# EAGLE board Compiled_Antenna_Test (EAGLE 7.7.0)
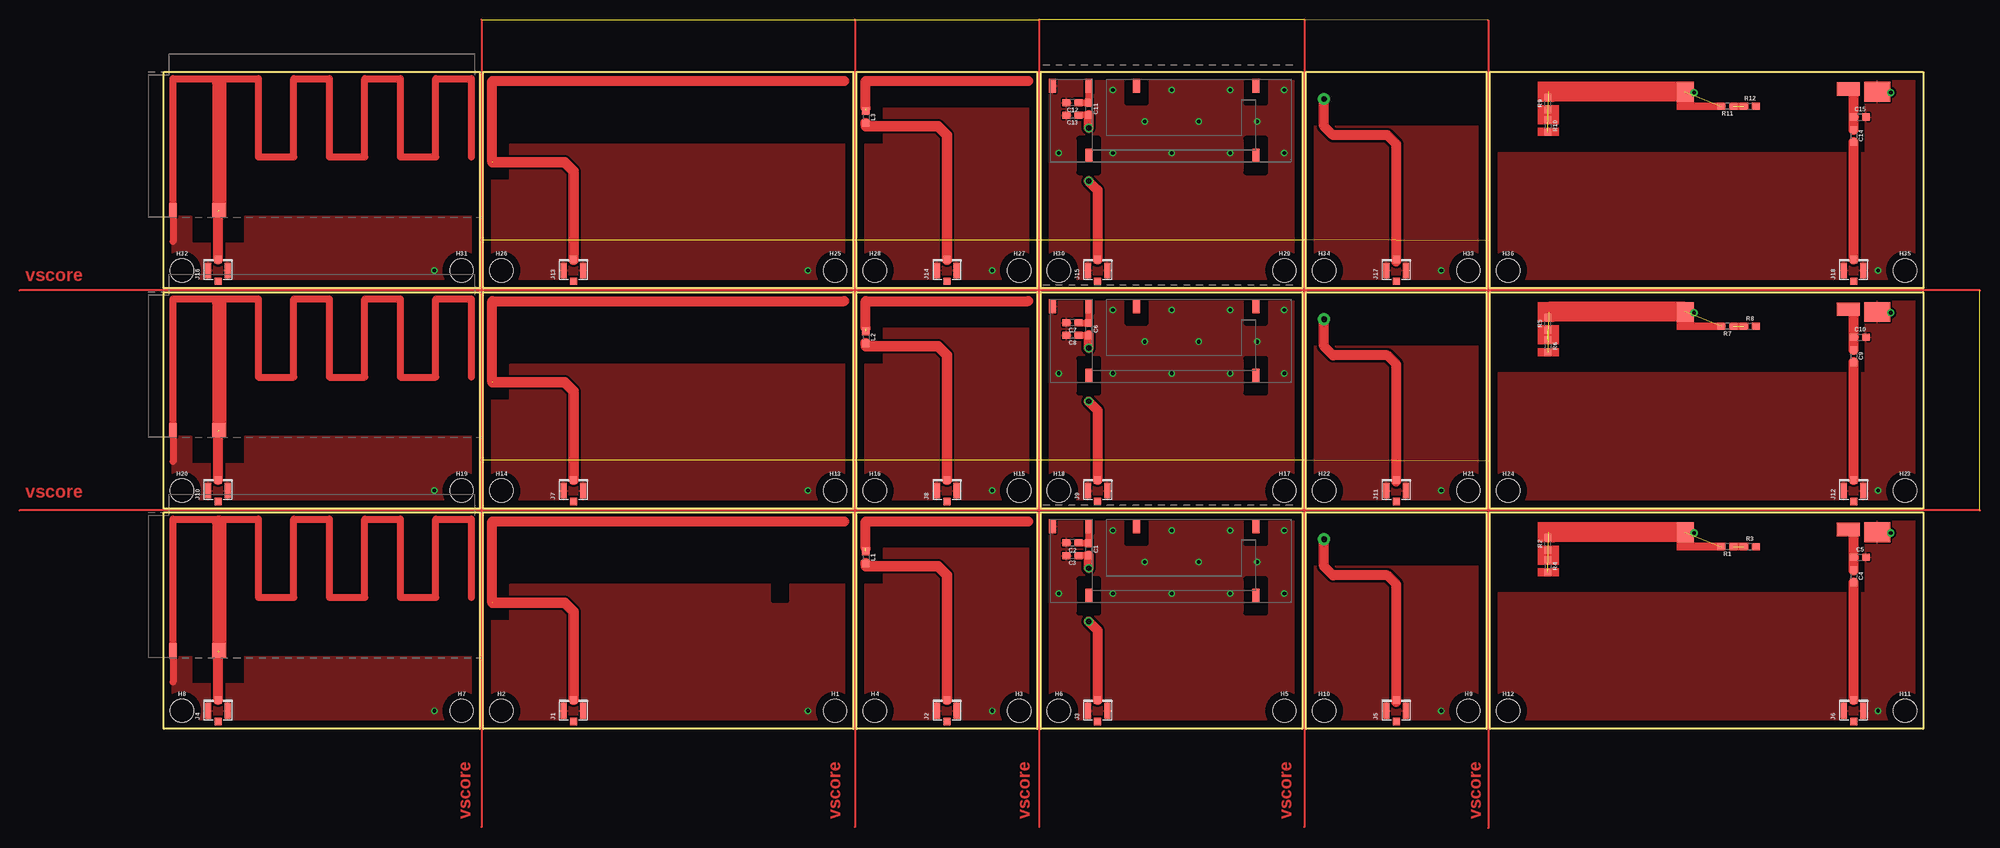
[diagram p0: board, top side]
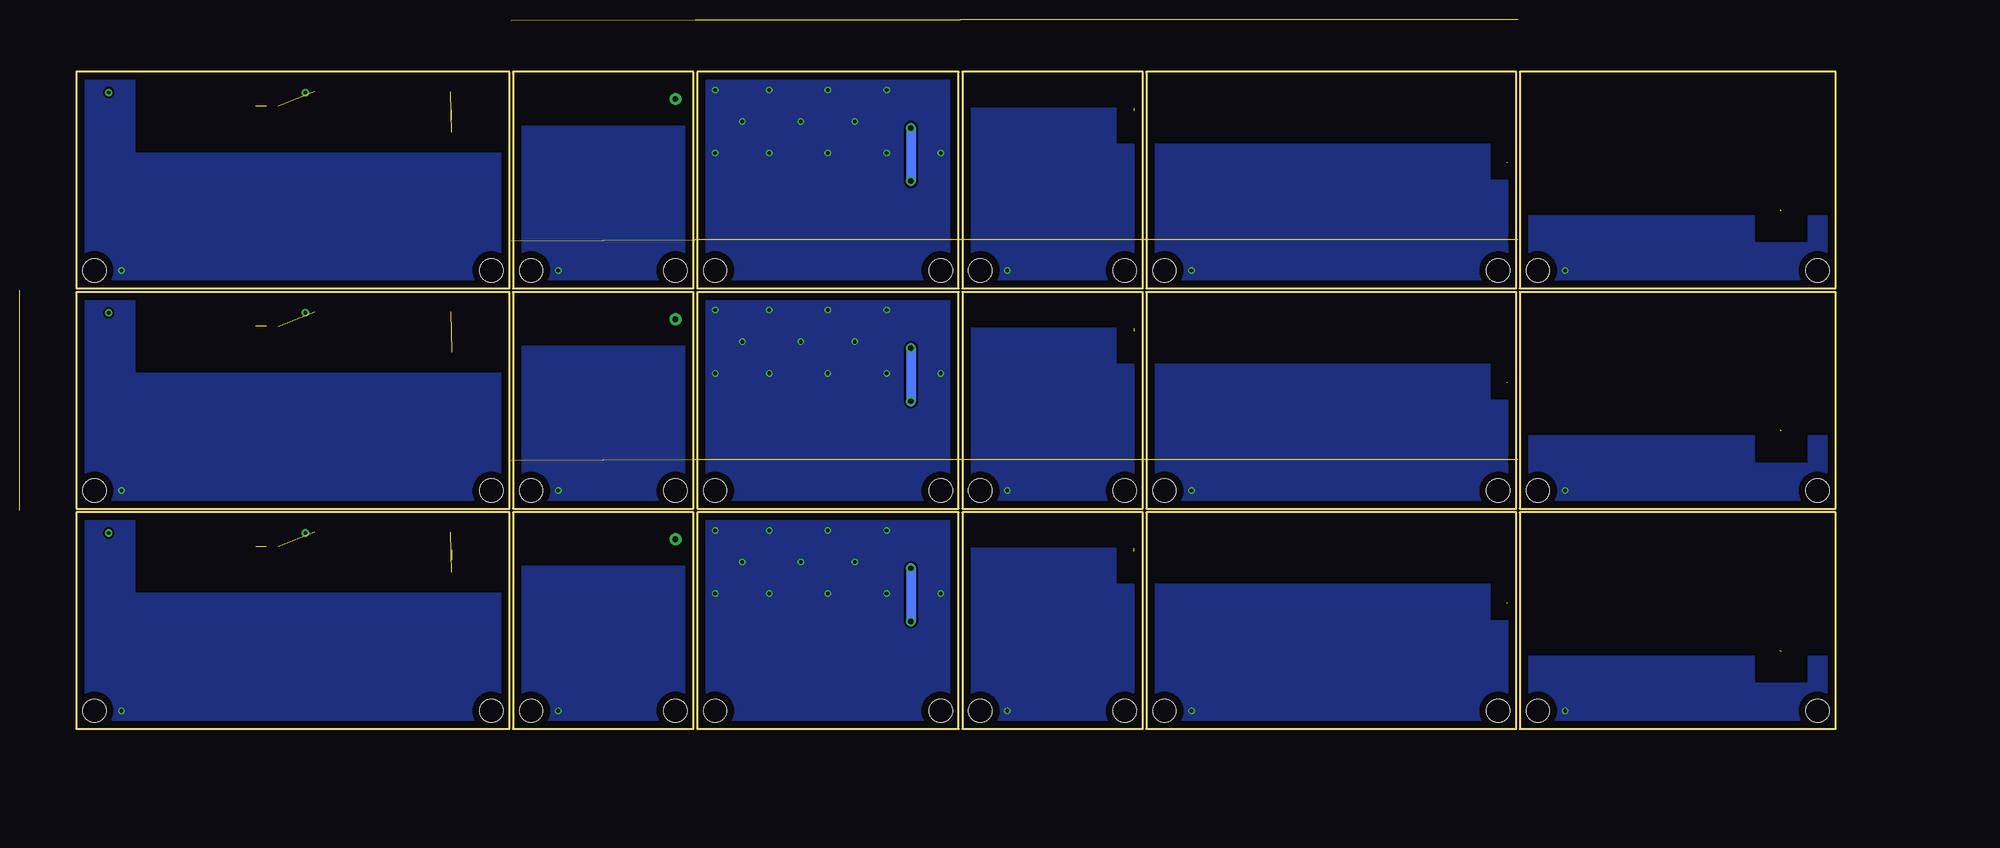
[diagram p1: board, bottom side, seen from below]

Size 247.65 x 92.46 mm. Coordinates in mm from the lower left corner, seen from the top.
Outline: 44.96,0 44.96,30.48 97.03,30.48 97.03,0 44.96,0
Outline: 97.54,0 97.54,30.48 122.94,30.48 122.94,0 97.54,0
Outline: 123.44,0 123.44,30.48 160.27,30.48 160.27,0 123.44,0
Outline: 0,0 0,30.48 44.45,30.48 44.45,0 0,0
Outline: 160.78,0 160.78,30.48 186.18,30.48 186.18,0 160.78,0
Outline: 186.69,0 186.69,30.48 247.65,30.48 247.65,0 186.69,0
Outline: 44.96,30.99 44.96,61.47 97.03,61.47 97.03,30.99 44.96,30.99
Outline: 97.54,30.99 97.54,61.47 122.94,61.47 122.94,30.99 97.54,30.99
Outline: 123.44,30.99 123.44,61.47 160.27,61.47 160.27,30.99 123.44,30.99
Outline: 0,30.99 0,61.47 44.45,61.47 44.45,30.99 0,30.99
Outline: 160.78,30.99 160.78,61.47 186.18,61.47 186.18,30.99 160.78,30.99
Outline: 186.69,30.99 186.69,61.47 247.65,61.47 247.65,30.99 186.69,30.99
Outline: 44.96,61.98 44.96,92.46 97.03,92.46 97.03,61.98 44.96,61.98
Outline: 97.54,61.98 97.54,92.46 122.94,92.46 122.94,61.98 97.54,61.98
Outline: 123.44,61.98 123.44,92.46 160.27,92.46 160.27,61.98 123.44,61.98
Outline: 0,61.98 0,92.46 44.45,92.46 44.45,61.98 0,61.98
Outline: 160.78,61.98 160.78,92.46 186.18,92.46 186.18,61.98 160.78,61.98
Outline: 186.69,61.98 186.69,92.46 247.65,92.46 247.65,61.98 186.69,61.98
Copper layers (1*16): Top 0.035mm / dielectric 1.5mm / Bottom 0.035mm
Design rules "default": minimum track width 10mil, minimum drill 0.6mm, track to track 8mil, track to pad 8mil, pad to pad 8mil, via to via 8mil, smd to smd 8mil, copper to edge 40mil, drill to drill 8mil, minimum pad ring 10mil, minimum via ring 8mil, stop-mask expansion 4mil, vias tented up to drill 0mil, thermal gap 10mil
tRestrict: area 85.7,18 to 87.8,21.2

## Footprints (pad centres in the part's own frame; a part is rotated, then mirrored left to right if it is on the bottom)
0603 = smd 1.1 x 1: 1 -0.85,0; 2 0.85,0
STAND-OFF = hole 3.302: 0,0
U.FL = smd 2.2 x 0.85: 1 0,1.375; 2 0,-1.375 | smd 1.05 x 1: FEED 1.525,0; NC -1.525,0
ONBOARD_SMD_STAMPED = smd 1 x 1.95: FEED 5.5,12; GND 0.4,12; NC@1 12.2,12; NC@2 29,12; NC@3 5.5,2.2; NC@4 29,2.2
ANTENNA_INVERTED_F_915MHZ = smd 2 x 2: FEED 6,2 | smd 1 x 2: GND -0.5,2
ETHERTRONICS_ISM_STAMPED = smd 3.23 x 1.88: FEED 8.5,1.4 | smd 3.66 x 2.79: GND 12.6,1 | drill 0.5: P$4 -13.2,0.9; P$5 14.5,0.9 | smd 2.39 x 2.79: STRIP -14.4,1

## Placement (x,y rotation side)
C1  4.7pF  [0603]  130.18,25.27 270 top
C2  1.0pF  [0603]  127.89,26.16 180 top
C3  1.0pF  [0603]  127.89,24.38 180 top
C4  4.7pF  [0603]  237.87,21.46 270 top
C5  1.0pF  [0603]  238.76,24.13 0 top
C6  4.7pF  [0603]  130.18,56.26 270 top
C7  1.0pF  [0603]  127.89,57.15 180 top
C8  1.0pF  [0603]  127.89,55.37 180 top
C9  4.7pF  [0603]  237.87,52.45 270 top
C10  1.0pF  [0603]  238.76,55.12 0 top
C11  4.7pF  [0603]  130.18,87.25 270 top
C12  1.0pF  [0603]  127.89,88.14 180 top
C13  1.0pF  [0603]  127.89,86.36 180 top
C14  4.7pF  [0603]  237.87,83.44 270 top
C15  1.0pF  [0603]  238.76,86.11 0 top
H1  STAND-OFF  [STAND-OFF]  94.49,2.54 0 top
H2  STAND-OFF  [STAND-OFF]  47.5,2.54 0 top
H3  STAND-OFF  [STAND-OFF]  120.4,2.54 0 top
H4  STAND-OFF  [STAND-OFF]  100.08,2.54 0 top
H5  STAND-OFF  [STAND-OFF]  157.73,2.54 0 top
H6  STAND-OFF  [STAND-OFF]  125.98,2.54 0 top
H7  STAND-OFF  [STAND-OFF]  41.91,2.54 0 top
H8  STAND-OFF  [STAND-OFF]  2.54,2.54 0 top
H9  STAND-OFF  [STAND-OFF]  183.64,2.54 0 top
H10  STAND-OFF  [STAND-OFF]  163.32,2.54 0 top
H11  STAND-OFF  [STAND-OFF]  245.11,2.54 0 top
H12  STAND-OFF  [STAND-OFF]  189.23,2.54 0 top
H13  STAND-OFF  [STAND-OFF]  94.49,33.53 0 top
H14  STAND-OFF  [STAND-OFF]  47.5,33.53 0 top
H15  STAND-OFF  [STAND-OFF]  120.4,33.53 0 top
H16  STAND-OFF  [STAND-OFF]  100.08,33.53 0 top
H17  STAND-OFF  [STAND-OFF]  157.73,33.53 0 top
H18  STAND-OFF  [STAND-OFF]  125.98,33.53 0 top
H19  STAND-OFF  [STAND-OFF]  41.91,33.53 0 top
H20  STAND-OFF  [STAND-OFF]  2.54,33.53 0 top
H21  STAND-OFF  [STAND-OFF]  183.64,33.53 0 top
H22  STAND-OFF  [STAND-OFF]  163.32,33.53 0 top
H23  STAND-OFF  [STAND-OFF]  245.11,33.53 0 top
H24  STAND-OFF  [STAND-OFF]  189.23,33.53 0 top
H25  STAND-OFF  [STAND-OFF]  94.49,64.52 0 top
H26  STAND-OFF  [STAND-OFF]  47.5,64.52 0 top
H27  STAND-OFF  [STAND-OFF]  120.4,64.52 0 top
H28  STAND-OFF  [STAND-OFF]  100.08,64.52 0 top
H29  STAND-OFF  [STAND-OFF]  157.73,64.52 0 top
H30  STAND-OFF  [STAND-OFF]  125.98,64.52 0 top
H31  STAND-OFF  [STAND-OFF]  41.91,64.52 0 top
H32  STAND-OFF  [STAND-OFF]  2.54,64.52 0 top
H33  STAND-OFF  [STAND-OFF]  183.64,64.52 0 top
H34  STAND-OFF  [STAND-OFF]  163.32,64.52 0 top
H35  STAND-OFF  [STAND-OFF]  245.11,64.52 0 top
H36  STAND-OFF  [STAND-OFF]  189.23,64.52 0 top
J1  U.FL  [U.FL]  57.66,2.54 90 top
J2  U.FL  [U.FL]  110.24,2.54 90 top
J3  U.FL  [U.FL]  131.44,2.54 90 top
J4  U.FL  [U.FL]  7.62,2.54 90 top
J5  U.FL  [U.FL]  173.48,2.54 90 top
J6  U.FL  [U.FL]  237.87,2.54 90 top
J7  U.FL  [U.FL]  57.66,33.53 90 top
J8  U.FL  [U.FL]  110.24,33.53 90 top
J9  U.FL  [U.FL]  131.44,33.53 90 top
J10  U.FL  [U.FL]  7.62,33.53 90 top
J11  U.FL  [U.FL]  173.48,33.53 90 top
J12  U.FL  [U.FL]  237.87,33.53 90 top
J13  U.FL  [U.FL]  57.66,64.52 90 top
J14  U.FL  [U.FL]  110.24,64.52 90 top
J15  U.FL  [U.FL]  131.44,64.52 90 top
J16  U.FL  [U.FL]  7.62,64.52 90 top
J17  U.FL  [U.FL]  173.48,64.52 90 top
J18  U.FL  [U.FL]  237.87,64.52 90 top
L1  33nH/±5%/500mA  [0603]  98.81,24.13 270 top
L2  33nH/±5%/500mA  [0603]  98.81,55.12 270 top
L3  33nH/±5%/500mA  [0603]  98.81,86.11 270 top
R1  0  [0603]  220.09,25.65 180 top
R2  0  [0603]  194.82,26.04 90 top
R3  0  [0603]  223.27,25.65 0 top
R4  0  [0603]  194.82,22.86 270 top
R5  0  [0603]  194.82,57.02 90 top
R6  0  [0603]  194.82,53.85 270 top
R7  0  [0603]  220.09,56.64 180 top
R8  0  [0603]  223.27,56.64 0 top
R9  0  [0603]  194.82,88.01 90 top
R10  0  [0603]  194.82,84.84 270 top
R11  0  [0603]  220.09,87.63 180 top
R12  0  [0603]  223.27,87.63 0 top
U$1  ONBOARD_SMD_STAMPED  [ONBOARD_SMD_STAMPED]  124.71,16.51 0 top
U$2  ANTENNA_915MHZ_INVERTED_F  [ANTENNA_INVERTED_F_915MHZ]  1.78,9.02 0 top
U$3  ETHERTRONICS_STAMPED_ANTENNA  [ETHERTRONICS_ISM_STAMPED]  228.6,26.67 0 top
U$4  ONBOARD_SMD_STAMPED  [ONBOARD_SMD_STAMPED]  124.71,47.5 0 top
U$5  ANTENNA_915MHZ_INVERTED_F  [ANTENNA_INVERTED_F_915MHZ]  1.78,40.01 0 top
U$6  ETHERTRONICS_STAMPED_ANTENNA  [ETHERTRONICS_ISM_STAMPED]  228.6,57.66 0 top
U$7  ONBOARD_SMD_STAMPED  [ONBOARD_SMD_STAMPED]  124.71,78.49 0 top
U$8  ANTENNA_915MHZ_INVERTED_F  [ANTENNA_INVERTED_F_915MHZ]  1.78,70.99 0 top
U$9  ETHERTRONICS_STAMPED_ANTENNA  [ETHERTRONICS_ISM_STAMPED]  228.6,88.65 0 top

## Library data of the parts
C1 C4 C6 C9 C11 C14 = SparkFun-Capacitors; PROD_ID: CAP-07880
C2 C3 C5 C7 C8 C10 C12 C13 C15 = SparkFun-Capacitors; PROD_ID: CAP-07879
H1-H36 = SparkFun-Hardware
J1-J18 = SparkFun-Connectors; PROD_ID: CONN-09193; SF_ID: WRL-09144
L1-L3 = SparkFun-Coils; PROD_ID: NDUC-07874
R1-R12 = SparkFun-Resistors; PROD_ID: RES-08609
U$1-U$9 = SparkX

## Nets
FEED: J1.FEED
FEED1: J2.FEED L1.2
FEED2: C1.1 C2.1 U$1.FEED
FEED3: J4.FEED U$2.FEED
FEED4: J5.FEED
FEED5: C4.1 C5.1 U$3.FEED
FEED6: J7.FEED
FEED7: J8.FEED L2.2
FEED8: C6.1 C7.1 U$4.FEED
FEED9: J10.FEED U$5.FEED
FEED10: J11.FEED
FEED11: C9.1 C10.1 U$6.FEED
FEED12: J13.FEED
FEED13: J14.FEED L3.2
FEED14: C11.1 C12.1 U$7.FEED
FEED15: J16.FEED U$8.FEED
FEED16: J17.FEED
FEED17: C14.1 C15.1 U$9.FEED
GND: J1.1 J1.2
GND1: J2.1 J2.2
GND2: C2.2 C3.2 J3.1 J3.2 U$1.GND
GND3: J4.1 J4.2 U$2.GND
GND4: J5.1 J5.2
GND5: C5.2 J6.1 J6.2 U$3.GND
GND6: J7.1 J7.2
GND7: J8.1 J8.2
GND8: C7.2 C8.2 J9.1 J9.2 U$4.GND
GND9: J10.1 J10.2 U$5.GND
GND10: J11.1 J11.2
GND11: C10.2 J12.1 J12.2 U$6.GND
GND12: J13.1 J13.2
GND13: J14.1 J14.2
GND14: C12.2 C13.2 J15.1 J15.2 U$7.GND
GND15: J16.1 J16.2 U$8.GND
GND16: J17.1 J17.2
GND17: C15.2 J18.1 J18.2 U$9.GND
N$1: C1.2 C3.1 J3.FEED
N$3: C4.2 J6.FEED
N$4: R2.1 R4.1
N$5: R1.1 R3.1
N$6: C6.2 C8.1 J9.FEED
N$8: C9.2 J12.FEED
N$9: R5.1 R6.1
N$10: R7.1 R8.1
N$11: C11.2 C13.1 J15.FEED
N$13: C14.2 J18.FEED
N$14: R9.1 R10.1
N$15: R11.1 R12.1
STRIP: L1.1
STRIP1: R1.2 R4.2
STRIP2: L2.1
STRIP3: R6.2 R7.2
STRIP4: L3.1
STRIP5: R10.2 R11.2

## Tracks (layer width: path | path; a pad name or v marks a point on that pad's centre or on a via)
FEED  (1 unrouted)
  Top 1.422: 46.23,17.78 46.23,29.21 95.76,29.21
  Top 1.448: J1.FEED 57.66,16.51 56.39,17.78 46.27,17.78
FEED1
  Top 1.448: J2.FEED 110.24,21.59 108.97,22.86 98.84,22.86 L1.2
FEED2
  Top 0.889: U$1.FEED 130.18,28.47 C1.1 128.78,26.12 C2.1
FEED3  (1 unrouted)
  Top 1.422: J4.FEED 7.62,10.86
FEED5
  Top 1.422: C4.1 237.87,24.09 C5.1 237.91,27.52 237.49,27.94 237.23,27.94 U$3.FEED
FEED6  (1 unrouted)
  Top 1.422: 46.23,48.77 46.23,60.2 95.76,60.2
  Top 1.448: J7.FEED 57.66,47.5 56.39,48.77 46.27,48.77
FEED7
  Top 1.448: J8.FEED 110.24,52.58 108.97,53.85 98.84,53.85 L2.2
FEED8
  Top 0.889: U$4.FEED 130.18,59.46 C6.1 128.78,57.11 C7.1
FEED9  (1 unrouted)
  Top 1.422: J10.FEED 7.62,41.85
FEED11
  Top 1.422: C9.1 237.87,55.08 C10.1 237.91,58.51 237.49,58.93 237.23,58.93 U$6.FEED
FEED12  (1 unrouted)
  Top 1.422: 46.23,79.76 46.23,91.19 95.76,91.19
  Top 1.448: J13.FEED 57.66,78.49 56.39,79.76 46.27,79.76
FEED13
  Top 1.448: J14.FEED 110.24,83.57 108.97,84.84 98.84,84.84 L3.2
FEED14
  Top 0.889: U$7.FEED 130.18,90.45 C11.1 128.78,88.1 C12.1
FEED15  (1 unrouted)
  Top 1.422: J16.FEED 7.62,72.83
FEED17
  Top 1.422: C14.1 237.87,86.07 C15.1 237.91,89.5 237.49,89.92 237.23,89.92 U$9.FEED
GND  (via drill 0.51)
  other vias: 90.68,2.54
  pour Top (isolate 0.305): 48.77,20.32 97.03,20.32 97.03,0 44.96,0 44.96,15.24 48.77,15.24
  pour Bottom (isolate 0.305): 48.77,20.32 48.77,15.24 44.96,15.24 44.96,0 97.03,0 97.03,20.32
GND1  (via drill 0.51)
  other vias: 116.59,2.54
  pour Top (isolate 0.305): 101.35,25.4 122.94,25.4 122.94,0 97.54,0 97.54,20.32 101.35,20.32
  pour Bottom (isolate 0.305): 101.35,25.4 101.35,20.32 97.54,20.32 97.54,0 122.94,0 122.94,25.4
GND2  (via drill 0.51)
  other vias: 133.6,27.94 125.98,19.05 133.6,19.05 138.05,23.5 141.86,27.94 145.67,23.5 141.86,19.05 150.11,19.05 150.11,27.94 153.92,23.5 157.73,27.94 157.73,19.05
  pour Top (isolate 0.305): 123.44,30.48 160.27,30.48 160.27,0 123.44,0
  pour Bottom (isolate 0.305): 123.44,30.48 160.27,30.48 160.27,0 123.44,0
GND3  (via drill 0.51)
  Top 1.016: U$2.GND 1.28,6.61 1.27,6.6
  other vias: 38.1,2.54
  pour Bottom (isolate 0.305): 0,10.16 3.81,10.16 3.81,6.35 11.43,6.35 11.43,10.16 44.45,10.16 44.45,0 0,0
  pour Top (isolate 0.305): 0,10.16 3.81,10.16 3.81,6.35 11.43,6.35 11.43,10.16 44.45,10.16 44.45,0 0,0
GND4  (via drill 0.51)
  other vias: 179.83,2.54
  pour Top (isolate 0.305): 160.78,22.86 186.18,22.86 186.18,0 160.78,0
  pour Bottom (isolate 0.305): 186.18,22.86 160.78,22.86 160.78,0 186.18,0
GND5  (via drill 0.51)
  other vias: 241.3,2.54
  pour Bottom (isolate 0.305): 247.65,30.48 239.52,30.48 239.52,19.05 186.69,19.05 186.69,0 247.65,0
  pour Top (isolate 0.305): 247.65,30.48 239.52,30.48 239.52,19.05 186.69,19.05 186.69,0 247.65,0
GND6  (via drill 0.51)
  other vias: 90.68,33.53
  pour Top (isolate 0.305): 48.77,51.31 97.03,51.31 97.03,30.99 44.96,30.99 44.96,46.23 48.77,46.23
  pour Bottom (isolate 0.305): 48.77,51.31 48.77,46.23 44.96,46.23 44.96,30.99 97.03,30.99 97.03,51.31
GND7  (via drill 0.51)
  other vias: 116.59,33.53
  pour Top (isolate 0.305): 101.35,56.39 122.94,56.39 122.94,30.99 97.54,30.99 97.54,51.31 101.35,51.31
  pour Bottom (isolate 0.305): 101.35,56.39 101.35,51.31 97.54,51.31 97.54,30.99 122.94,30.99 122.94,56.39
GND8  (via drill 0.51)
  other vias: 133.6,58.93 125.98,50.04 133.6,50.04 138.05,54.48 141.86,58.93 145.67,54.48 141.86,50.04 150.11,50.04 150.11,58.93 153.92,54.48 157.73,58.93 157.73,50.04
  pour Top (isolate 0.305): 123.44,61.47 160.27,61.47 160.27,30.99 123.44,30.99
  pour Bottom (isolate 0.305): 123.44,61.47 160.27,61.47 160.27,30.99 123.44,30.99
GND9  (via drill 0.51)
  Top 1.016: U$5.GND 1.28,37.6 1.27,37.59
  other vias: 38.1,33.53
  pour Bottom (isolate 0.305): 0,41.15 3.81,41.15 3.81,37.34 11.43,37.34 11.43,41.15 44.45,41.15 44.45,30.99 0,30.99
  pour Top (isolate 0.305): 0,41.15 3.81,41.15 3.81,37.34 11.43,37.34 11.43,41.15 44.45,41.15 44.45,30.99 0,30.99
GND10  (via drill 0.51)
  other vias: 179.83,33.53
  pour Top (isolate 0.305): 160.78,53.85 186.18,53.85 186.18,30.99 160.78,30.99
  pour Bottom (isolate 0.305): 186.18,53.85 160.78,53.85 160.78,30.99 186.18,30.99
GND11  (via drill 0.51)
  other vias: 241.3,33.53
  pour Bottom (isolate 0.305): 247.65,61.47 239.52,61.47 239.52,50.04 186.69,50.04 186.69,30.99 247.65,30.99
  pour Top (isolate 0.305): 247.65,61.47 239.52,61.47 239.52,50.04 186.69,50.04 186.69,30.99 247.65,30.99
GND12  (via drill 0.51)
  other vias: 90.68,64.52
  pour Top (isolate 0.305): 48.77,82.3 97.03,82.3 97.03,61.98 44.96,61.98 44.96,77.22 48.77,77.22
  pour Bottom (isolate 0.305): 48.77,82.3 48.77,77.22 44.96,77.22 44.96,61.98 97.03,61.98 97.03,82.3
GND13  (via drill 0.51)
  other vias: 116.59,64.52
  pour Top (isolate 0.305): 101.35,87.38 122.94,87.38 122.94,61.98 97.54,61.98 97.54,82.3 101.35,82.3
  pour Bottom (isolate 0.305): 101.35,87.38 101.35,82.3 97.54,82.3 97.54,61.98 122.94,61.98 122.94,87.38
GND14  (via drill 0.51)
  other vias: 133.6,89.92 125.98,81.03 133.6,81.03 138.05,85.47 141.86,89.92 145.67,85.47 141.86,81.03 150.11,81.03 150.11,89.92 153.92,85.47 157.73,89.92 157.73,81.03
  pour Top (isolate 0.305): 123.44,92.46 160.27,92.46 160.27,61.98 123.44,61.98
  pour Bottom (isolate 0.305): 123.44,92.46 160.27,92.46 160.27,61.98 123.44,61.98
GND15  (via drill 0.51)
  Top 1.016: U$8.GND 1.28,68.59 1.27,68.58
  other vias: 38.1,64.52
  pour Bottom (isolate 0.305): 0,72.14 3.81,72.14 3.81,68.33 11.43,68.33 11.43,72.14 44.45,72.14 44.45,61.98 0,61.98
  pour Top (isolate 0.305): 0,72.14 3.81,72.14 3.81,68.33 11.43,68.33 11.43,72.14 44.45,72.14 44.45,61.98 0,61.98
GND16  (via drill 0.51)
  other vias: 179.83,64.52
  pour Top (isolate 0.305): 160.78,84.84 186.18,84.84 186.18,61.98 160.78,61.98
  pour Bottom (isolate 0.305): 186.18,84.84 160.78,84.84 160.78,61.98 186.18,61.98
GND17  (via drill 0.51)
  other vias: 241.3,64.52
  pour Bottom (isolate 0.305): 247.65,92.46 239.52,92.46 239.52,81.03 186.69,81.03 186.69,61.98 247.65,61.98
  pour Top (isolate 0.305): 247.65,92.46 239.52,92.46 239.52,81.03 186.69,81.03 186.69,61.98 247.65,61.98
N$1  (via drill 0.76)
  Top 0.889: C1.2 128.78,24.42 C3.1
  Top 1.422: C1.2 v130.18,22.61 | v130.18,15.11 131.44,13.84 J3.FEED
  Bottom 1.422: v130.18,22.61 v130.18,15.11
N$2  (via drill 0.81 pad 1.68)
  Top 1.422: 173.48,3.81 173.48,20.32 172.21,21.59 164.59,21.59 163.32,22.86 v163.32,26.67
N$3
  Top 1.422: J6.FEED C4.2
N$4  (1 unrouted)
N$5  (1 unrouted)
N$6  (via drill 0.76)
  Top 0.889: C6.2 128.78,55.41 C8.1
  Top 1.422: C6.2 v130.18,53.59 | v130.18,46.1 131.44,44.83 J9.FEED
  Bottom 1.422: v130.18,53.59 v130.18,46.1
N$7  (via drill 0.81 pad 1.68)
  Top 1.422: 173.48,34.8 173.48,51.31 172.21,52.58 164.59,52.58 163.32,53.85 v163.32,57.66
N$8
  Top 1.422: J12.FEED C9.2
N$9  (1 unrouted)
N$10  (1 unrouted)
N$11  (via drill 0.76)
  Top 0.889: C11.2 128.78,86.4 C13.1
  Top 1.422: C11.2 v130.18,84.58 | v130.18,77.09 131.44,75.82 J15.FEED
  Bottom 1.422: v130.18,84.58 v130.18,77.09
N$12  (via drill 0.81 pad 1.68)
  Top 1.422: 173.48,65.79 173.48,82.3 172.21,83.57 164.59,83.57 163.32,84.84 v163.32,88.65
N$13
  Top 1.422: J18.FEED C14.2
N$14  (1 unrouted)
N$15  (1 unrouted)
S$1  (4 unrouted)
  Top 0.254: 44.7,37.85 44.7,-13.84 | 97.28,37.85 97.28,-13.84 | 123.19,37.85 123.19,-13.84 | 160.53,37.85 160.53,-13.84 | 186.44,37.72 186.44,-13.97
S$2  (4 unrouted)
  Top 0.254: 44.7,68.83 44.7,30.61 | 97.28,68.83 97.28,30.61 | 123.19,68.83 123.19,30.61 | 160.53,68.83 160.53,30.61 | 186.44,68.71 186.44,30.48
S$3  (4 unrouted)
  Top 0.254: 44.7,99.82 44.7,61.59 | 97.28,99.82 97.28,61.59 | 123.19,99.82 123.19,61.59 | 160.53,99.82 160.53,61.59 | 186.44,99.69 186.44,61.47
S$4  (1 unrouted)
  Top 0.254: 255.65,30.73 -20.32,30.73 | 255.65,61.72 -20.32,61.72
STRIP  (1 unrouted)
  Top 1.422: 98.81,25.4 98.81,29.21 121.67,29.21
STRIP1  (2 unrouted)
  Top 2.794: 214.12,27.69 194.94,27.69
STRIP2  (1 unrouted)
  Top 1.422: 98.81,56.39 98.81,60.2 121.67,60.2
STRIP3  (2 unrouted)
  Top 2.794: 214.12,58.67 194.94,58.67
STRIP4  (1 unrouted)
  Top 1.422: 98.81,87.38 98.81,91.19 121.67,91.19
STRIP5  (2 unrouted)
  Top 2.794: 214.12,89.66 194.94,89.66
(copper drawn outside any net)
  shapes: Top area x18

## Text on the board
Top: vscore | vscore | vscore | vscore | vscore | vscore | vscore